# EAGLE board Maquina de turing - Tinkercad (EAGLE 9.7.0)

Size 190.32 x 195.7 mm. Coordinates in mm from the lower left corner, seen from the top.
Outline: 0,0 190.32,0 190.32,195.7 0,195.7 0,0
Copper layers (1*16): Top 0.035mm / dielectric 1.5mm / Bottom 0.035mm
Design rules "default": minimum track width 6mil, minimum drill 0.35mm, track to track 6mil, track to pad 6mil, pad to pad 6mil, via to via 6mil, smd to smd 6mil, copper to edge 40mil, drill to drill 6mil, minimum pad ring 10mil, minimum via ring 8mil, stop-mask expansion 4mil, vias tented up to drill 0mil, thermal gap 10mil

## Footprints (pad centres in the part's own frame; a part is rotated, then mirrored left to right if it is on the bottom)
SWITCH-SPDT-PTH-8.5X3.7MM = drill 1.016 pad 1.88: 1 -2.54,0; 2 0,0; 3 2.54,0
ARDUINO-UNO-R3-SHIELD = drill 1.016 pad 1.88: 3.3V 24.13,-2.54; 5V 24.13,0; A0 24.13,12.7; A1 24.13,15.24; A2 24.13,17.78; A3 24.13,20.32; A4 24.13,22.86; A5 24.13,25.4; AREF -24.13,-13.97; D2 -24.13,20.32; D3 -24.13,17.78; D4 -24.13,15.24; D5 -24.13,12.7; D6 -24.13,10.16; D7 -24.13,7.62; D8 -24.13,3.81; D9 -24.13,1.27; D10 -24.13,-1.27; D11 -24.13,-3.81; D12 -24.13,-6.35; D13 -24.13,-8.89; GND@0 24.13,2.54; GND@1 24.13,5.08; GND@2 -24.13,-11.43; IOREF 24.13,-7.62; NC 24.13,-10.16; RES 24.13,-5.08; RX -24.13,25.4; SCL -24.13,-19.05; SDA -24.13,-16.51; TX -24.13,22.86; VIN 24.13,7.62
LCD-I2C = drill 1.016 long: 1 -19.05,-5.08; 2 -19.05,-7.62; 3 -19.05,-10.16; 4 -19.05,-12.7

## Placement (x,y rotation side)
S1  TOGGLE  [SWITCH-SPDT-PTH-8.5X3.7MM]  37.9,188.71 0 top
S2  TOGGLE  [SWITCH-SPDT-PTH-8.5X3.7MM]  48.06,188.71 0 top
S3  TOGGLE  [SWITCH-SPDT-PTH-8.5X3.7MM]  58.22,188.71 0 top
S4  TOGGLE  [SWITCH-SPDT-PTH-8.5X3.7MM]  68.38,188.71 0 top
S5  TOGGLE  [SWITCH-SPDT-PTH-8.5X3.7MM]  78.54,188.71 0 top
S6  TOGGLE  [SWITCH-SPDT-PTH-8.5X3.7MM]  88.7,188.71 0 top
S7  TOGGLE  [SWITCH-SPDT-PTH-8.5X3.7MM]  98.86,188.71 0 top
S8  TOGGLE  [SWITCH-SPDT-PTH-8.5X3.7MM]  109.02,188.71 0 top
S9  TOGGLE  [SWITCH-SPDT-PTH-8.5X3.7MM]  7.42,186.17 0 top
U2  ARDUINO-UNO-R3-SHIELD  [ARDUINO-UNO-R3-SHIELD]  61.51,33.98 270 top
U3  LCD-16X2-I2CSUNFOUNDER-IIC  [LCD-I2C]  134.69,36.63 0 top

## Library data of the parts
S1-S9 U2 U3 = Tinkercad

## Nets
U2_5V: S1.1 S2.1 S3.1 S4.1 S5.1 S6.1 S7.1 S8.1 S9.1 U2.5V U3.2
U2_D2: S6.2 U2.D2
U2_D3: S5.2 U2.D3
U2_D4: S4.2 U2.D4
U2_D5: S3.2 U2.D5
U2_D6: S2.2 U2.D6
U2_D7: S1.2 U2.D7
U2_D8: S9.2 U2.D8
U2_GND: S1.3 S2.3 S3.3 S4.3 S5.3 S6.3 S7.3 S8.3 S9.3 U2.GND@0 U2.GND@1 U2.GND@2 U3.1
U2_RX: S8.2 U2.RX
U2_SCL: U2.SCL U3.4
U2_SDA: U2.SDA U3.3
U2_TX: S7.2 U2.TX

## Tracks (layer width: path | path; a pad name or v marks a point on that pad's centre or on a via)
U2_5V  (10 unrouted)
U2_D2  (1 unrouted)
U2_D3  (1 unrouted)
U2_D4  (1 unrouted)
U2_D5  (1 unrouted)
U2_D6  (1 unrouted)
U2_D7  (1 unrouted)
U2_D8  (1 unrouted)
U2_GND  (12 unrouted)
U2_RX  (1 unrouted)
U2_SCL  (1 unrouted)
U2_SDA  (1 unrouted)
U2_TX  (1 unrouted)